# EAGLE board relay (EAGLE 9.6.2)
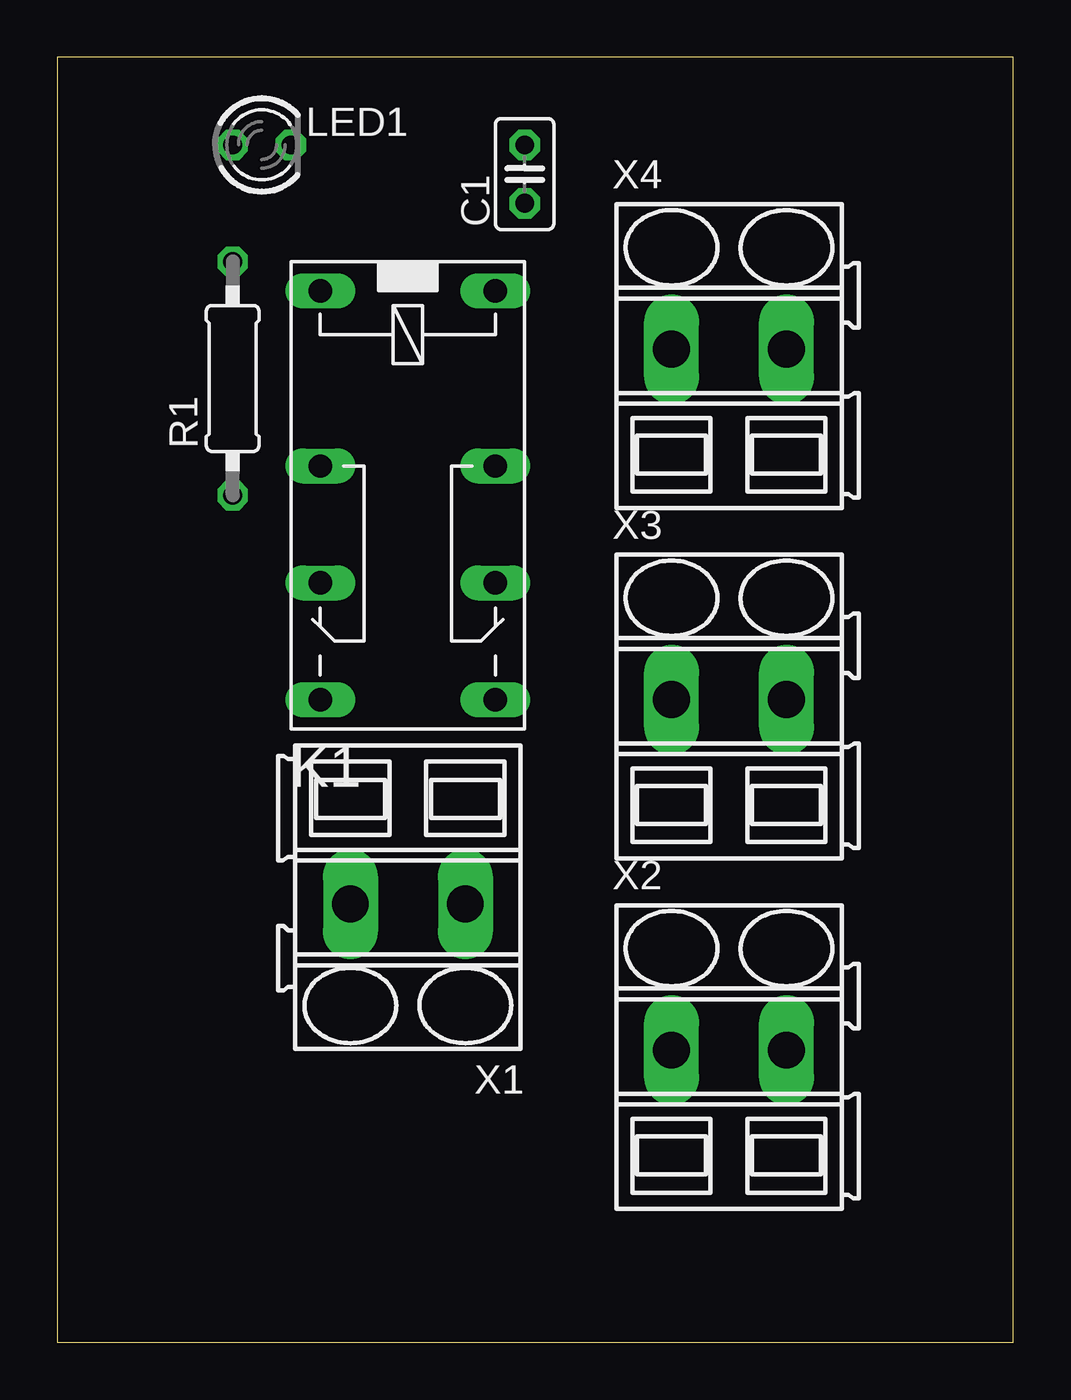
[diagram p0: board, top side]
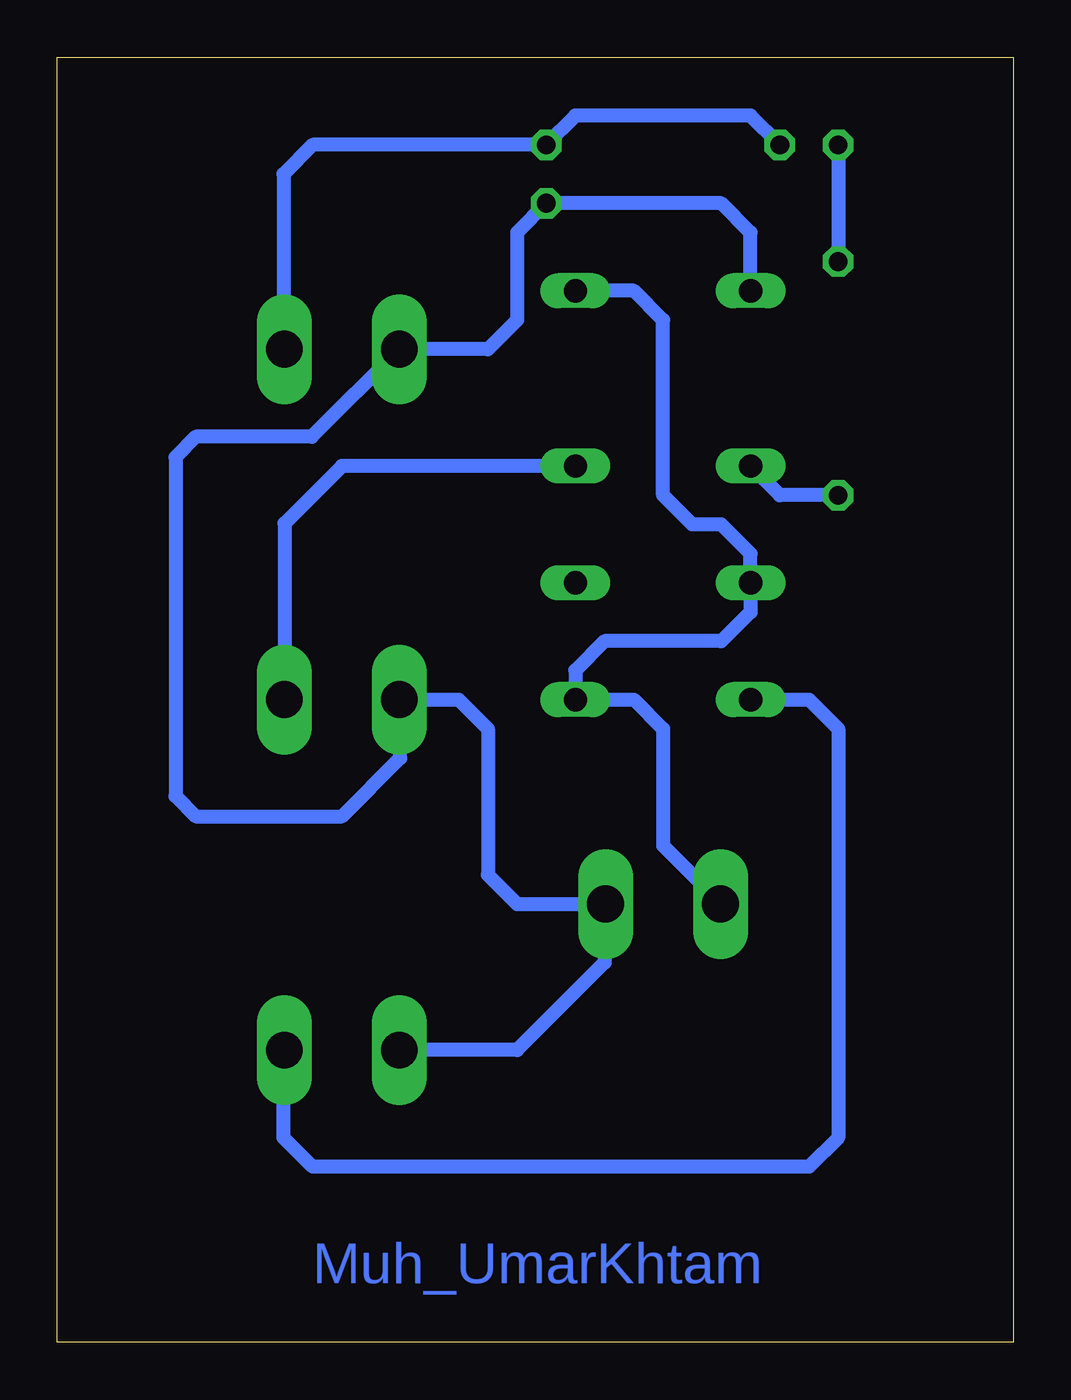
[diagram p1: board, bottom side, seen from below]

Size 41.58 x 55.87 mm. Coordinates in mm from the lower left corner, seen from the top.
Outline: 0,0 41.58,0 41.58,55.87 0,55.87 0,0
Copper layers (1*16): Top 0.035mm / dielectric 1.5mm / Bottom 0.035mm
Design rules "default": minimum track width 6mil, minimum drill 0.35mm, track to track 6mil, track to pad 6mil, pad to pad 6mil, via to via 6mil, smd to smd 6mil, copper to edge 40mil, drill to drill 6mil, minimum pad ring 10mil, minimum via ring 8mil, stop-mask expansion 4mil, vias tented up to drill 0mil, thermal gap 10mil

## Footprints (pad centres in the part's own frame; a part is rotated, then mirrored left to right if it is on the bottom)
C025-025X050 = drill 0.813 octagon: 1 -1.27,0; 2 1.27,0
351 = drill 1.016 long: 1 -3.81,-3.81; 16 -3.81,3.81; O1 8.89,-3.81; O2 8.89,3.81; P1 3.81,-3.81; P2 3.81,3.81; S1 13.97,-3.81; S2 13.97,3.81
LED3MM = drill 0.813 octagon: A -1.27,0; K 1.27,0
0207/10 = drill 0.813 octagon: 1 -5.08,0; 2 5.08,0
SMKDSP_1,5/2 = drill 1.6 pad 1.8 long: 1 -2.5,0; 2 2.5,0

## Placement (x,y rotation side)
C1  [C025-025X050]  20.32,50.8 90 top
K1  351  [351]  15.24,41.91 270 top
LED1  [LED3MM]  8.89,52.07 0 top
R1  [0207/10]  7.62,41.91 90 top
X1  SMKDSP_1,5/2  [SMKDSP_1,5/2]  15.24,19.05 180 top
X2  SMKDSP_1,5/2  [SMKDSP_1,5/2]  29.21,12.7 0 top
X3  SMKDSP_1,5/2  [SMKDSP_1,5/2]  29.21,27.94 0 top
X4  SMKDSP_1,5/2  [SMKDSP_1,5/2]  29.21,43.18 0 top

## Library data of the parts
C1 = rcl; SPICEPREFIX: C
K1 = relay; OC_FARNELL: unknown; OC_NEWARK: unknown
LED1 = led
R1 = rcl; SPICEPREFIX: R
X1-X4 = con-phoenix-smkdsp; MF: FARNELL; MPN: 1733570; OC_FARNELL: 3041244; OC_NEWARK: 69C8588

## Nets
GND: C1.1 K1.1 X1.1 X2.1 X3.1 X4.1
N$1: K1.P1 R1.1
N$2: LED1.A R1.2
O1: K1.S1 X2.2
P2: K1.P2 X3.2
S12: K1.16 K1.O1 K1.S2 X1.2
VOUT: C1.2 LED1.K X4.2

## Tracks (layer width: path | path; a pad name or v marks a point on that pad's centre or on a via)
GND
  Bottom 0.61: X2.1 21.59,12.7 17.78,16.51 17.78,19.01 X1.1 21.59,19.05 22.86,20.32 22.86,26.67 24.13,27.94 X3.1 26.67,27.94 26.67,25.4 29.21,22.86 35.56,22.86 36.45,23.75 36.45,38.48 35.56,39.37 30.52,39.37 X4.1 22.86,43.18 21.59,44.45 21.59,48.26 C1.1 12.7,49.53 11.43,48.26 K1.1
N$1
  Bottom 0.61: K1.P1 10.16,36.83 R1.1
N$2
  Bottom 0.61: LED1.A R1.2
O1
  Bottom 0.61: K1.S1 8.89,27.94 7.62,26.67 7.62,8.89 8.89,7.62 30.48,7.62 31.75,8.89 31.75,12.66 X2.2
P2
  Bottom 0.61: K1.P2 29.21,38.1 31.71,35.6 X3.2
S12
  Bottom 0.61: X1.2 12.74,19.09 15.24,21.59 15.24,26.67 16.51,27.94 K1.S2 19.05,29.21 17.78,30.48 12.7,30.48 11.43,31.75 K1.O1 11.43,34.29 12.7,35.56 13.97,35.56 15.24,36.83 15.24,44.45 16.51,45.72 K1.16
VOUT
  Bottom 0.61: LED1.K 11.43,53.34 19.05,53.34 C1.2 30.48,52.07 31.75,50.8 31.75,43.22 X4.2

## Text on the board
Bottom: Muh_UmarKhtam